# EAGLE board CircuitSchematic (EAGLE 8.1.0)
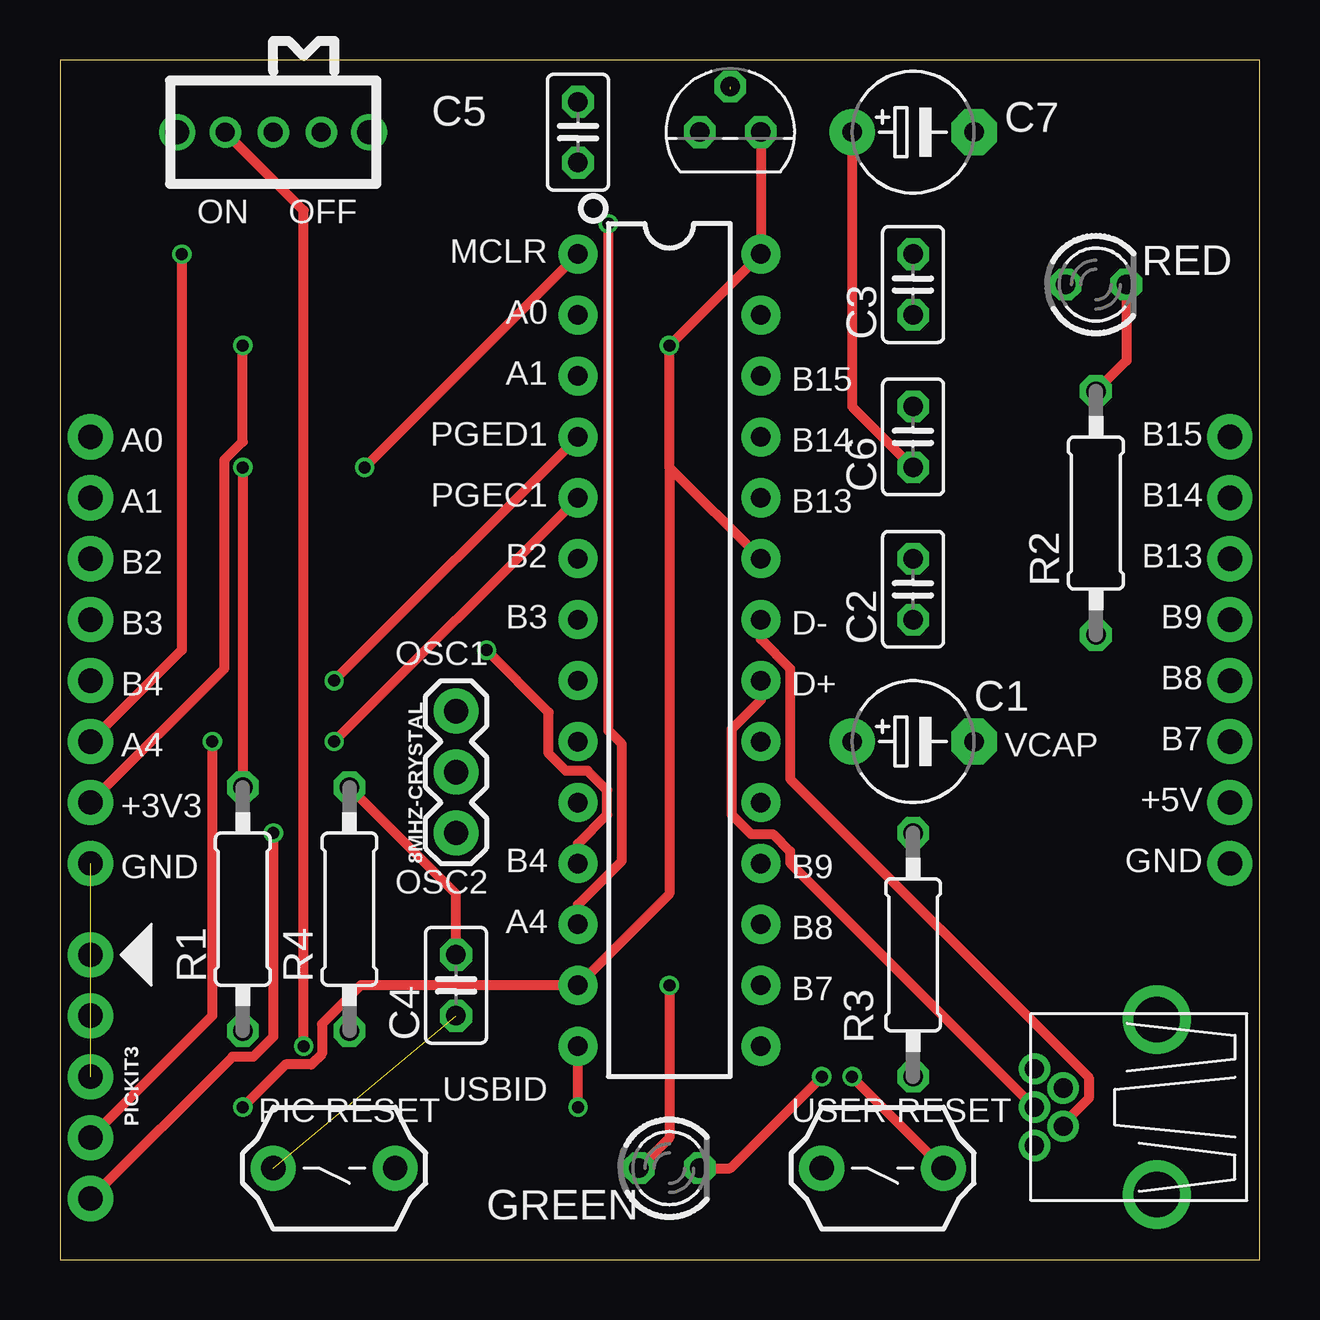
[diagram p0: board, top side]
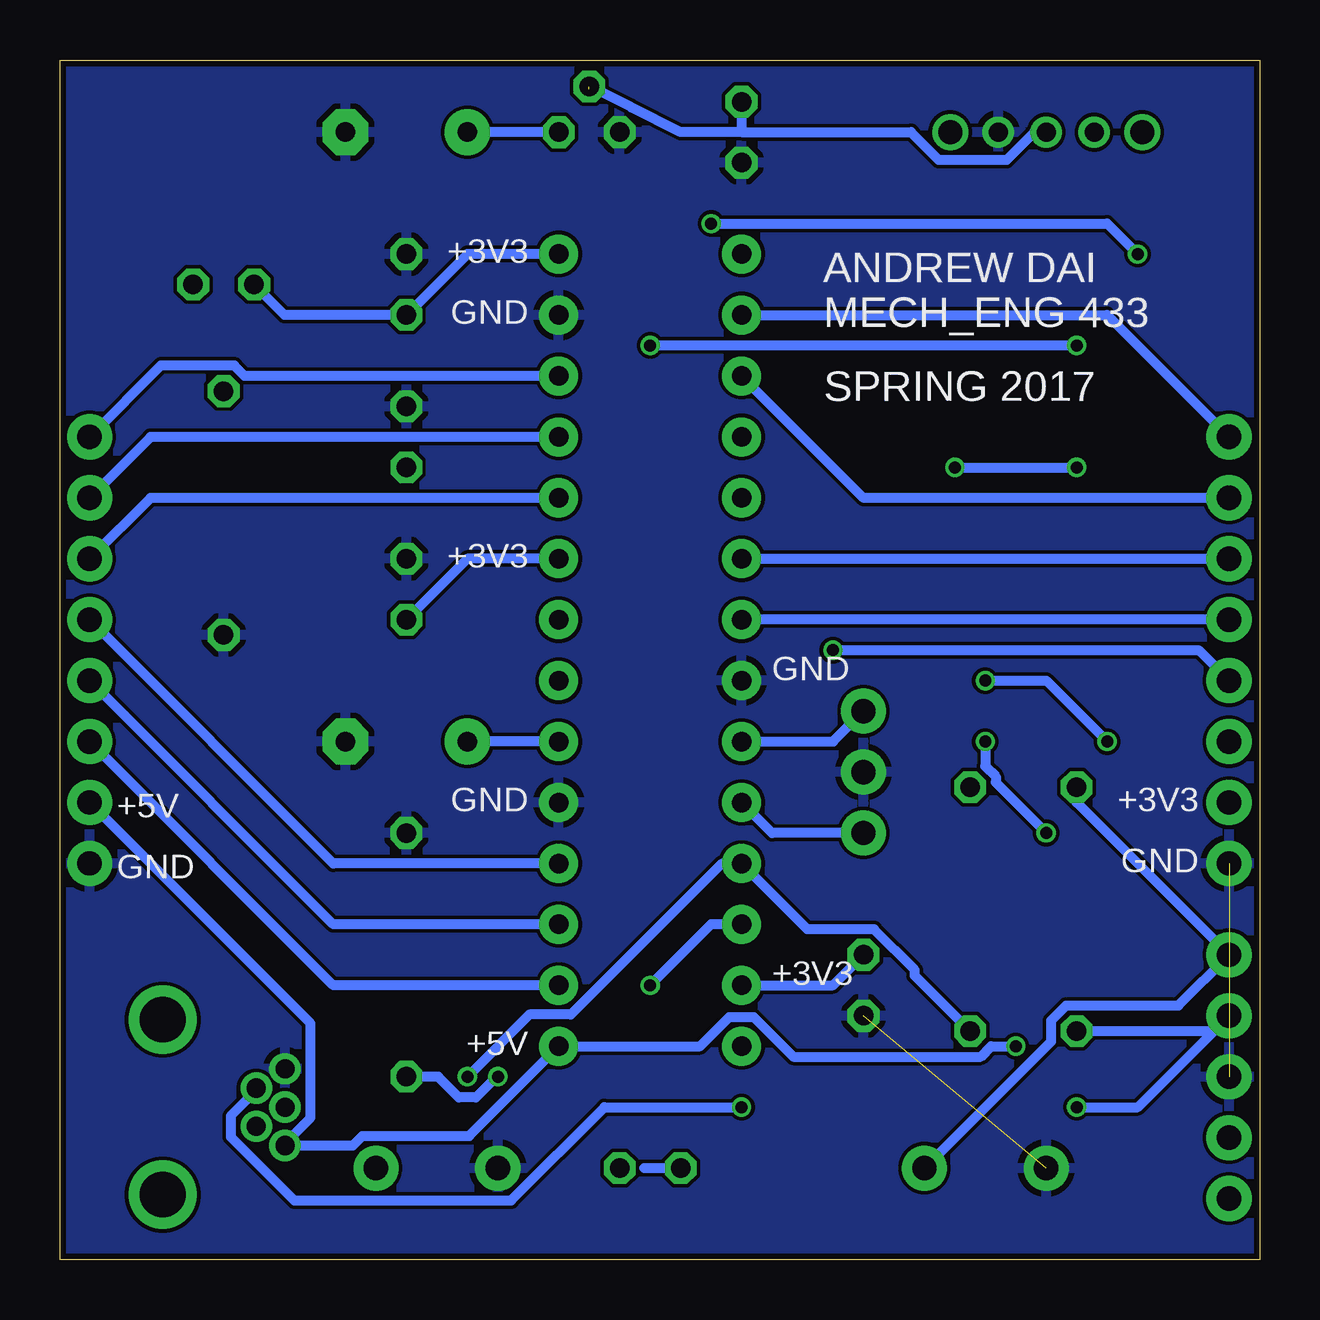
[diagram p1: board, bottom side, seen from below]

Size 50 x 50 mm. Coordinates in mm from the lower left corner, seen from the top.
Outline: 0,0 50,0 50,50 0,50 0,0
Copper layers (1*16): Top 0.035mm / dielectric 1.5mm / Bottom 0.035mm
Design rules "SeeedStudio_2layer_DRU_no_angle_20140221": minimum track width 6mil, minimum drill 12mil, track to track 6mil, track to pad 6mil, pad to pad 6mil, via to via 6mil, smd to smd 0mil, copper to edge 10mil, drill to drill 10mil, minimum pad ring 10mil, minimum via ring 6mil, stop-mask expansion 2mil, vias tented up to drill 100mil, thermal gap 10mil

## Footprints (pad centres in the part's own frame; a part is rotated, then mirrored left to right if it is on the bottom)
1X03 = drill 1.016 pad 1.88: 1 0,0; 2 2.54,0; 3 5.08,0
E5-5 = drill 0.813 pad 1.905: + -2.54,0 | drill 0.813 pad 1.905 octagon: - 2.54,0
C025-025X050 = drill 0.813 octagon: 1 -1.27,0; 2 1.27,0
LED3MM = drill 0.813 octagon: A -1.27,0; K 1.27,0
0207/10 = drill 0.813 octagon: 1 -5.08,0; 2 5.08,0
SLIDE-SWITCH-2 = drill 0.8: 1 -2,0; 2 0,0; 3 2,0 | drill 1: P$1 -4,0; P$2 4,0
PUSH-BUTTON = drill 1.016 pad 1.88: 1 0,0; 2 5.08,0
DIP28 = drill 0.813 pad 1.626: 1 -16.51,-3.81; 2 -13.97,-3.81; 3 -11.43,-3.81; 4 -8.89,-3.81; 5 -6.35,-3.81; 6 -3.81,-3.81; 7 -1.27,-3.81; 8 1.27,-3.81; 9 3.81,-3.81; 10 6.35,-3.81; 11 8.89,-3.81; 12 11.43,-3.81; 13 13.97,-3.81; 14 16.51,-3.81; 15 16.51,3.81; 16 13.97,3.81; 17 11.43,3.81; 18 8.89,3.81; 19 6.35,3.81; 20 3.81,3.81; 21 1.27,3.81; 22 -1.27,3.81; 23 -3.81,3.81; 24 -6.35,3.81; 25 -8.89,3.81; 26 -11.43,3.81; 27 -13.97,3.81; 28 -16.51,3.81
PICKIT3 = drill 1.016 pad 1.88: 1 0,0; 2 2.54,0; 3 5.08,0; 4 7.62,0; 5 10.16,0
CONN8 = drill 1.016 pad 1.88: 1 0,0; 2 2.54,0; 3 5.08,0; 4 7.62,0; 5 10.16,0; 6 12.7,0; 7 15.24,0; 8 17.78,0
USB-MB-H = drill 0.8: D+ 5.1,0; D- 3.9,0.8; GND 5.1,-1.6; ID 3.9,-0.8; VBUS 5.1,1.6 | drill 1.9: P$6 0,-3.65; P$7 0,3.65
TO92 = drill 0.813 octagon: 1 -1.27,0; 2 0,1.905; 3 1.27,0

## Placement (x,y rotation side)
8MHZ-CRYSTAL  [1X03]  16.51,17.78 90 top
C1  10uF  [E5-5]  35.56,21.59 0 top
C2  0.1uF  [C025-025X050]  35.56,27.94 90 top
C3  0.1uF  [C025-025X050]  35.56,40.64 90 top
C4  0.1uF  [C025-025X050]  16.51,11.43 270 top
C5  0.1uF  [C025-025X050]  21.59,46.99 270 top
C6  0.1uF  [C025-025X050]  35.56,34.29 90 top
C7  10uF  [E5-5]  35.56,46.99 0 top
GREEN  [LED3MM]  25.4,3.81 0 top
R1  10K  [0207/10]  7.62,14.61 90 top
R2  330  [0207/10]  43.18,31.11 90 top
R3  330  [0207/10]  35.56,12.7 270 top
R4  10K  [0207/10]  12.06,14.61 270 top
RED  [LED3MM]  43.18,40.64 0 top
U$1  SLIDE-SWITCH  [SLIDE-SWITCH-2]  8.89,46.99 0 top
U$2  PUSH-BUTTON  [PUSH-BUTTON]  13.97,3.81 180 top
U$3  PUSH-BUTTON  [PUSH-BUTTON]  36.83,3.81 180 top
U$4  PIC32  [DIP28]  25.4,25.4 270 top
U$5  PICKIT3  [PICKIT3]  1.27,12.7 270 top
U$6  CONN8  [CONN8]  48.77,16.51 90 top
U$7  CONN8  [CONN8]  1.27,16.51 90 top
USB-MINI-B  USB-MB-H  [USB-MB-H]  45.72,6.35 180 top
VOLTAGE-REGULATOR  MCP1702  [TO92]  27.94,46.99 0 top

## Library data of the parts
8MHZ-CRYSTAL = SparkFun-Connectors
C1-C7 R1-R4 = resistor
GREEN RED = led
U$1-U$7 USB-MINI-B VOLTAGE-REGULATOR = ME433

## Nets
+3V3: C2.1 C3.1 C4.1 C6.1 C7.+ R1.1 R4.1 RED.A U$4.13 U$4.23 U$4.28 U$5.2 U$7.2 VOLTAGE-REGULATOR.3
+5V: U$1.1 U$4.15 U$6.2 USB-MINI-B.VBUS
A0: U$4.2 U$7.8
A1: U$4.3 U$7.7
A4/LED: GREEN.A U$4.12 U$7.3
B2: U$4.6 U$7.6
B3: U$4.7 U$7.5
B4/USER: R4.2 U$3.1 U$4.11 U$7.4
B7: U$4.16 U$6.3
B8: U$4.17 U$6.4
B9: U$4.18 U$6.5
B13: U$4.24 U$6.6
B14: U$4.25 U$6.7
B15: U$4.26 U$6.8
D+: U$4.21 USB-MINI-B.D+
D-: U$4.22 USB-MINI-B.D-
GND: 8MHZ-CRYSTAL.2 C1.- C2.2 C3.2 C4.2 C5.2 C6.2 C7.- R2.1 R3.1 U$1.3 U$2.2 U$3.2 U$4.8 U$4.19 U$4.27 U$5.3 U$6.1 U$7.1 USB-MINI-B.GND VOLTAGE-REGULATOR.1
MCLR: R1.2 U$2.1 U$4.1 U$5.1
N$1: C1.+ U$4.20
N$2: R2.2 RED.K
N$3: GREEN.K R3.2
N$4: C5.1 U$1.2 VOLTAGE-REGULATOR.2
OSC1: 8MHZ-CRYSTAL.3 U$4.9
OSC2: 8MHZ-CRYSTAL.1 U$4.10
PGEC1: U$4.5 U$5.5
PGED1: U$4.4 U$5.4
USBID: U$4.14 USB-MINI-B.ID

## Tracks (layer width: path | path; a pad name or v marks a point on that pad's centre or on a via)
+3V3  (via drill 0.5)
  Top 0.406: VOLTAGE-REGULATOR.3 U$4.28 v25.4,38.1 25.4,33.02 | 25.4,33.02 25.4,15.24 U$4.13 12.53,11.43 10.92,9.81 10.92,8.58 10.47,8.13 9.4,8.13 v7.62,6.35 | U$4.23 25.4,33.02 | C7.+ 33.02,35.56 C6.1 | C4.1 16.51,15.24 R4.1 | v7.62,38.1 7.62,34.09 6.86,33.33 6.86,24.64 U$7.2
  Bottom 0.406: VOLTAGE-REGULATOR.3 C7.+ | U$4.28 33.02,41.91 C3.1 40.64,39.37 RED.A | U$4.23 33.02,29.21 C2.1 | U$4.13 17.78,11.43 C4.1 | R1.1 1.91,9.53 U$5.2 5.08,6.35 v7.62,6.35 | v7.62,38.1 v25.4,38.1
+5V  (via drill 0.5)
  Top 0.406: v10.16,8.89 10.16,43.72 U$1.1
  Bottom 0.406: v10.16,8.89 11.19,8.89 11.62,8.46 19.43,8.46 21.09,10.11 22.09,10.11 23.31,8.89 U$4.15 32.94,5.16 37.39,5.16 37.79,4.75 USB-MINI-B.VBUS 40.62,4.85 39.56,5.91 39.56,9.84 U$6.2
A0
  Bottom 0.406: U$4.2 6.35,39.37 U$7.8
A1
  Bottom 0.406: U$7.7 16.51,31.75 U$4.3
A4/LED  (via drill 0.5)
  Top 0.406: v25.4,11.43 25.4,5.08 GREEN.A | U$4.12 21.59,14.79 23.42,16.61 23.42,21.48 22.86,22.04 v22.86,43.18 | v5.08,41.91 5.08,25.4 U$7.3
  Bottom 0.406: U$4.12 22.86,13.97 v25.4,11.43 | v22.86,43.18 6.35,43.18 v5.08,41.91 | GREEN.A 25.65,3.81
B2
  Bottom 0.406: U$4.6 U$7.6
B3
  Bottom 0.406: U$7.5 U$4.7
B4/USER  (via drill 0.5)
  Top 0.406: v33.02,7.62 U$3.1 | U$4.11 21.59,17.33 22.81,18.55 22.81,19.55 21.99,20.37 21.09,20.37 20.37,21.09 20.37,22.81 v17.78,25.4
  Bottom 0.406: v33.02,7.62 30.43,10.21 28.7,10.21 22.41,16.51 U$4.11 18.85,13.77 16.07,13.77 14.37,12.06 14.37,11.83 R4.2 | v17.78,25.4 2.54,25.4 U$7.4
B7
  Bottom 0.406: U$4.16 38.61,11.43 U$6.3
B8
  Bottom 0.406: U$4.17 38.61,13.97 U$6.4
B9
  Bottom 0.406: U$4.18 38.61,16.51 U$6.5
B13
  Bottom 0.406: U$4.24 46.23,31.75 U$6.6
B14
  Bottom 0.406: U$4.25 46.23,34.29 U$6.7
B15
  Bottom 0.406: U$4.26 42.31,36.83 42.74,37.26 45.8,37.26 U$6.8
D+
  Top 0.406: USB-MINI-B.D+ 30.43,16.54 30.43,17.02 29.71,17.73 28.81,17.73 27.99,18.55 27.99,22.09 29.21,23.31 U$4.21
D-
  Top 0.406: U$4.22 29.21,25.85 30.43,24.64 30.43,20.04 42.88,7.59 42.88,6.71 41.82,5.65 USB-MINI-B.D-
GND  (2 unrouted)
  pour Bottom: 0,49.53 0,0 50.16,0 50.16,50.16 0,50.16
MCLR  (via drill 0.5)
  Top 0.406: U$4.1 v12.7,33.02 | v7.62,33.02 R1.2
  Bottom 0.406: v12.7,33.02 v7.62,33.02 | R1.2 7.62,19.05 U$5.1 3.38,10.59 8.06,10.59 8.69,9.97 8.69,9.09 U$2.1
N$1
  Bottom 0.406: U$4.20 C1.+
N$2
  Top 0.406: RED.K 44.45,37.47 R2.2
N$3  (via drill 0.5)
  Top 0.406: GREEN.K 27.94,3.81 v31.75,7.62
  Bottom 0.406: R3.2 34.24,7.62 33.38,6.76 32.66,6.76 31.8,7.62 v31.75,7.62
N$4  (1 unrouted)
  Bottom 0.406: U$1.2 9.39,46.99 10.55,45.83 13.37,45.83 14.53,46.99 21.59,46.99 | 21.59,46.99 24.13,46.99 26.19,48.02 26.23,48.06 27.68,48.78 27.94,48.78 | C5.1 21.59,46.99
OSC1
  Bottom 0.406: U$4.9 17.78,21.59 8MHZ-CRYSTAL.3
OSC2
  Bottom 0.406: 8MHZ-CRYSTAL.1 20.32,17.78 U$4.10
PGEC1  (via drill 0.5)
  Top 0.406: U$4.5 v11.43,21.59 | U$5.5 7.19,8.46 8.06,8.46 8.89,9.29 v8.89,17.78
  Bottom 0.406: v11.43,21.59 11.43,20.56 11,20.13 11,19.89 v8.89,17.78
PGED1  (via drill 0.5)
  Top 0.406: U$4.4 v11.43,24.13 | v6.35,21.59 6.35,10.16 U$5.4
  Bottom 0.406: v11.43,24.13 8.89,24.13 v6.35,21.59
USBID  (via drill 0.5)
  Top 0.406: v21.59,6.35 U$4.14
  Bottom 0.406: USB-MINI-B.ID 41.82,7.05 42.88,5.99 42.88,5.11 40.23,2.46 31.19,2.46 27.31,6.35 v21.59,6.35

## Text on the board
tPlace: ON | OFF | MCLR | A0 | A1 | B15 | PGED1 | B15 | A0 | B14 | PGEC1 | B14 | A1 | B13 | B2 | B13 | B2 | B3 | B9 | B3 | D- | OSC1 | B8 | B4 | D+ | B7 | A4 | VCAP | +5V | +3V3 | B4 | GND | GND | B9 | OSC2 | A4 | B8 | B7 | USBID | PIC RESET | USER RESET
bPlace: +3V3 | ANDREW DAI | GND | MECH_ENG 433 | SPRING 2017 | +3V3 | GND | +3V3 | GND | +5V | GND | GND | +3V3 | +5V